# Altium PCB PCB1.PcbDoc
Units mm, origin at the board's own origin, x right, y up, seen from the top; angles counter-clockwise.
Board outline 28.5 x 23.5 mm, 2 copper layers (Top Layer, Bottom Layer); 34 components, 51 nets, 216 pads, 113 vias.
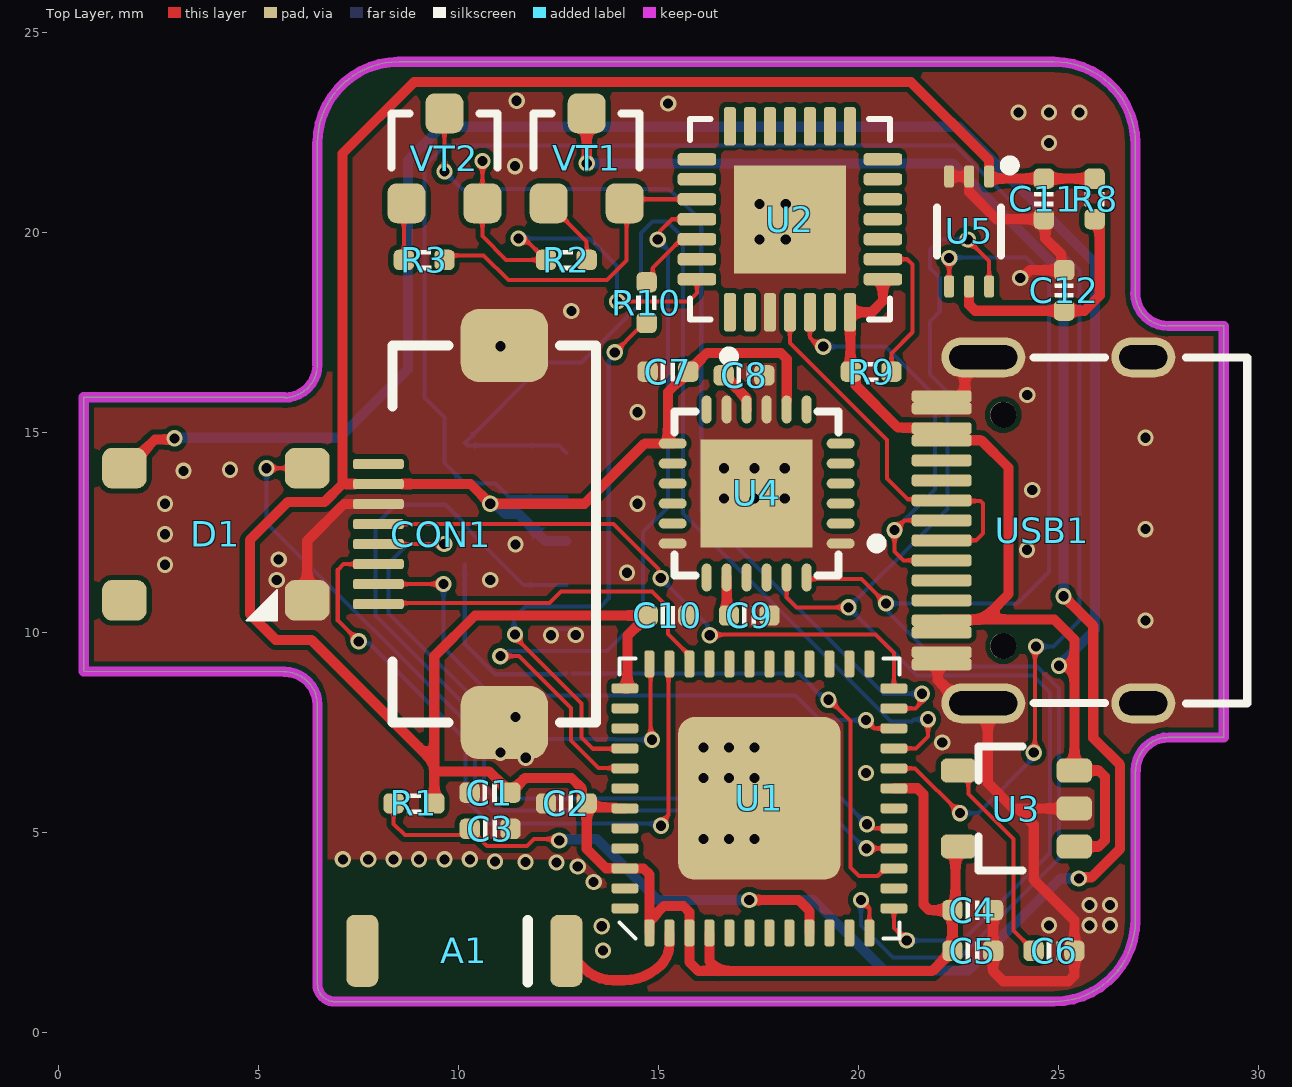
[diagram p0: Top Layer view]
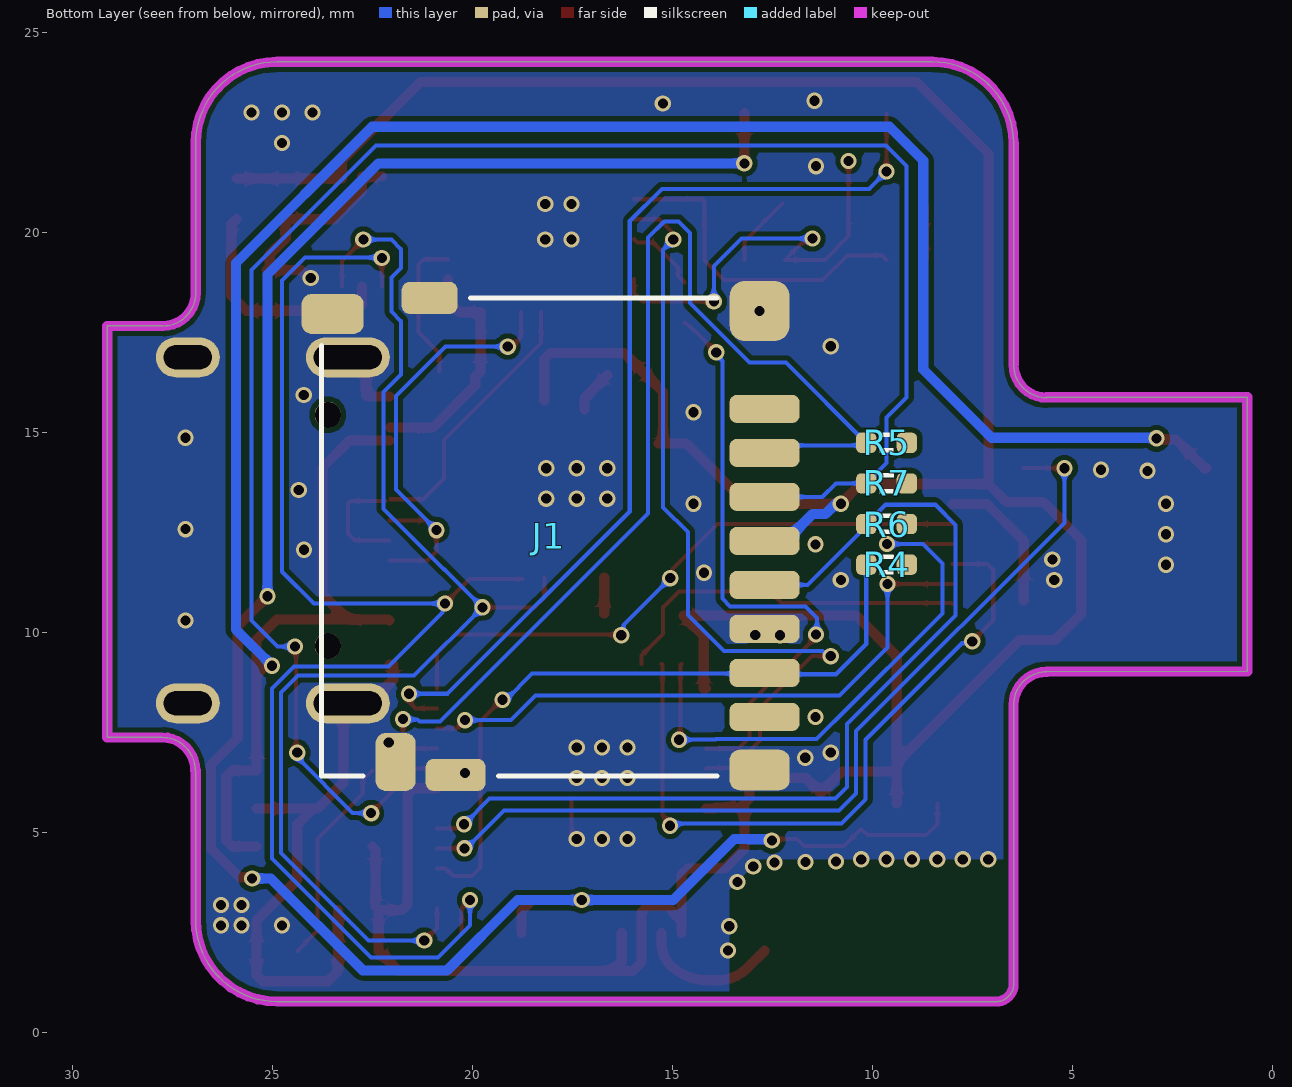
[diagram p1: Bottom Layer view, seen from below]
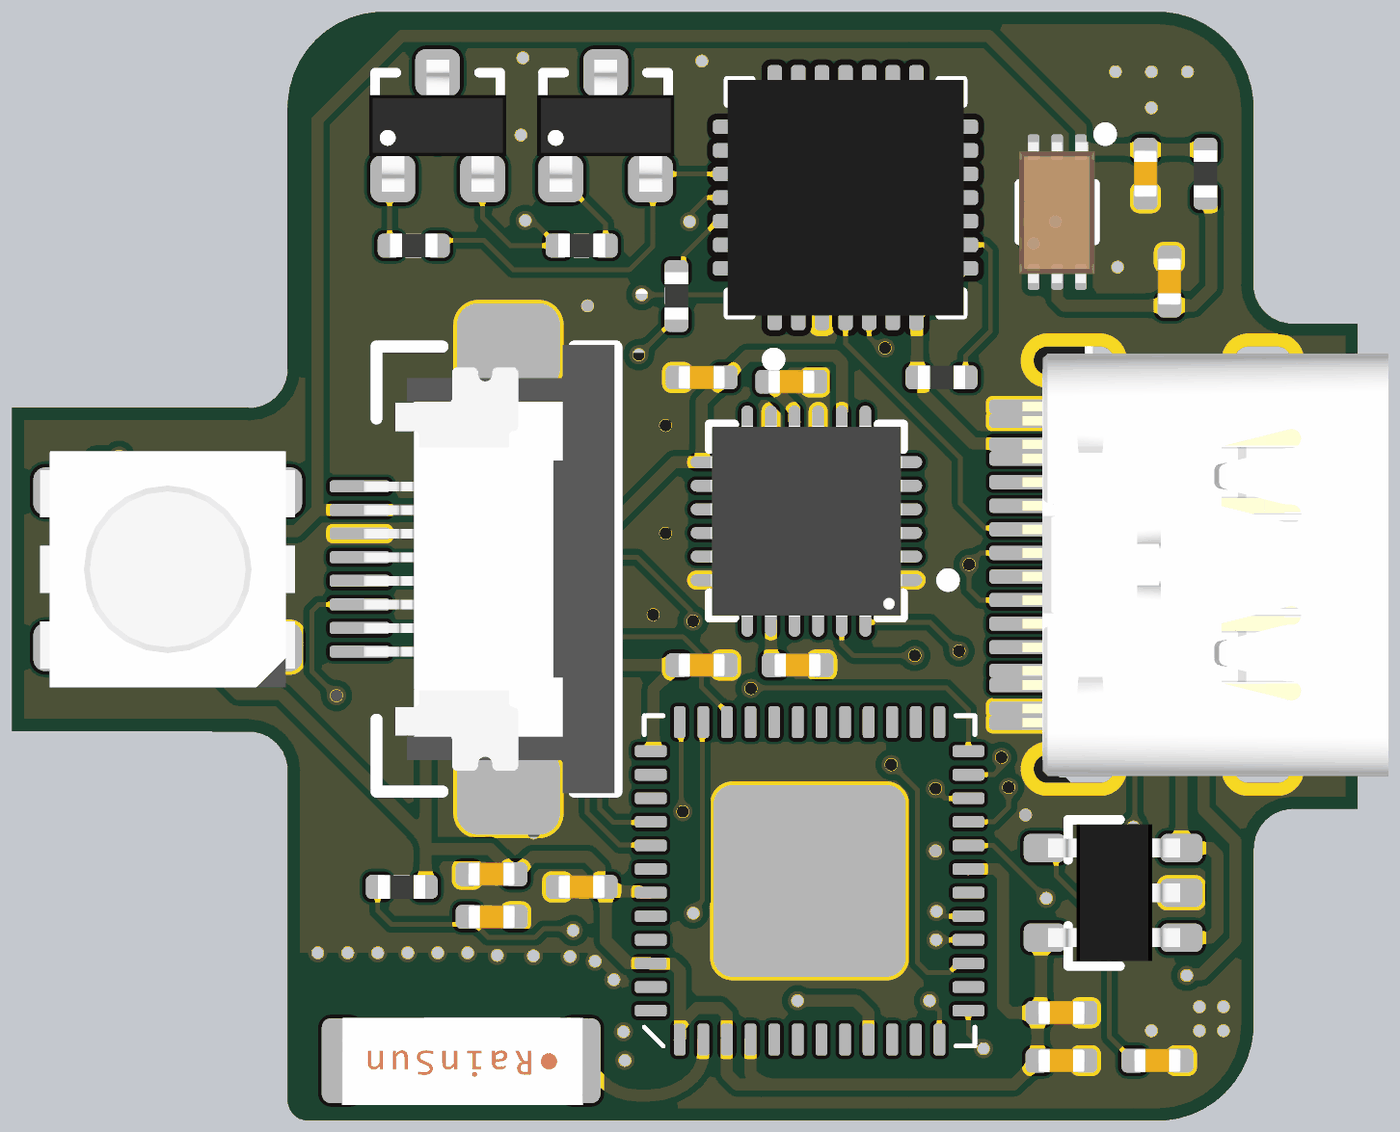
[diagram p2: 3D render of the assembled board from above, using the file's embedded part models]
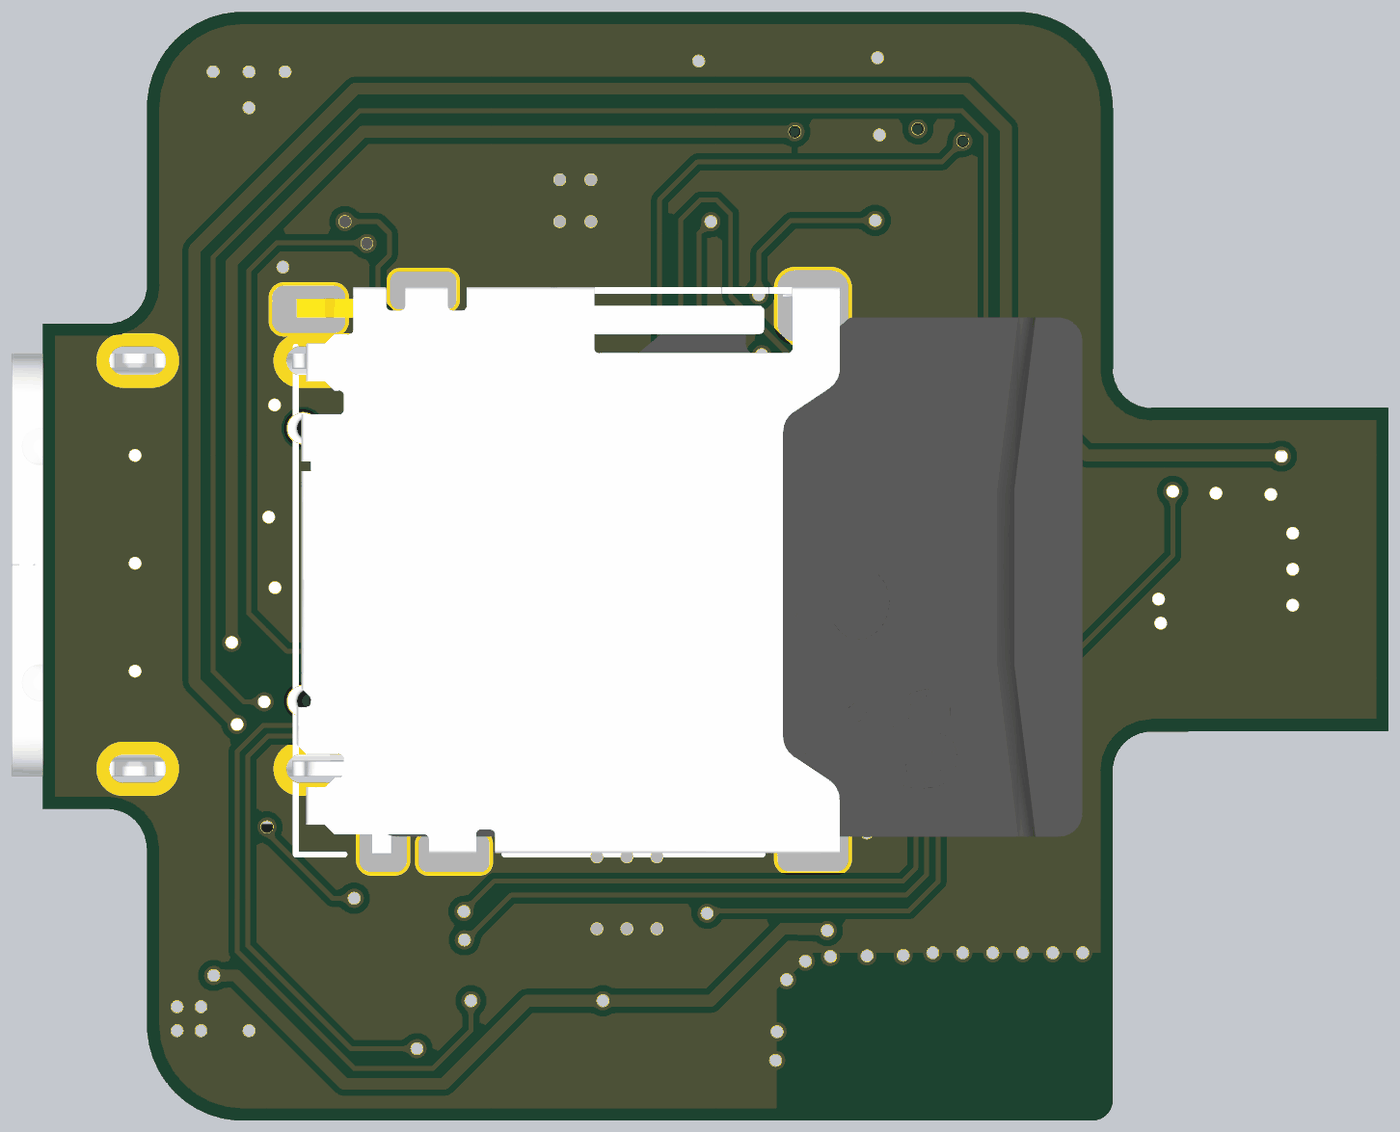
[diagram p3: 3D render of the assembled board from below, using the file's embedded part models]

## Layer stack, top to bottom
Top Solder: solder mask 0.0102, Solder Resist, Dk 3.5
Top Layer: signal copper 0.0356
Dielectric 1: dielectric 0.32, FR-4, Dk 4.8
Bottom Layer: signal copper 0.0356
Bottom Solder: solder mask 0.0102, Solder Resist, Dk 3.5

## Board outline
5.649,9.007 cw(c5.649,8.179) 6.477,8.179 6.477,1.196 ccw(c6.911,1.196) 6.911,0.762 24.892,0.762 ccw(c24.892,2.794) 26.924,2.794 26.924,6.538 26.934,6.538 cw(c27.762,6.538) 27.762,7.366 29.134,7.366 29.134,17.653 27.749,17.653 27.749,17.651 cw(c27.749,18.479) 26.922,18.479 26.924,18.479 26.924,22.225 ccw(c24.892,22.225) 24.892,24.257 8.509,24.257 ccw(c8.509,22.225) 6.477,22.225 6.472,22.225 6.472,16.688 6.477,16.688 cw(c5.649,16.688) 5.649,15.86 5.649,15.87 0.635,15.87 0.635,9.017

## Design rules (kind name [scope] priority, off if disabled: settings)
AssemblyTestPointUsage [All] p1 off:
AssemblyTestpoint [All] p1 off: testpointundercomponent=TRUE minsize=1.016 maxsize=2.54 preferedsize=1.524 minholesize=0 maxholesize=1.016 preferedholesize=0.813 testpointgrid=0.025 usegrid=TRUE gridtolerance=0 allowsidetop=TRUE allowsidebottom=TRUE
Clearance [All] p1: gap=0.127 ignorepadtopadclearanceinfootprint=FALSE
ComponentClearance [All] p1 off: gap=0.254 collisioncheckmode=3 verticalgap=0.254 showdistances=FALSE
DiffPairsRouting [All] p1 off: maxlimit=0.254 minlimit=0.229 mostfreqgap=0.229 toplayer_minwidth=0.102 toplayer_maxwidth=0.102 toplayer_prefwidth=0.102 bottomlayer_minwidth=0.102 bottomlayer_maxwidth=0.102 bottomlayer_prefwidth=0.102 maxuncoupledlength=12.7
FabricationTestPointUsage [All] p1 off: valid=0 allowmultiple=FALSE
FabricationTestpoint [All] p1 off: side=3 testpointundercomponent=TRUE minsize=1.016 maxsize=2.54 preferedsize=1.524 minholesize=0 maxholesize=1.016 preferedholesize=0.813 testpointgrid=0.025 allowsidetop=TRUE allowsidebottom=TRUE usegrid=TRUE gridtolerance=0
FanoutControl Fanout_BGA [IsBGA] p1 off: bgadir=Out bgaviamode=Centered fanoutstyle=Auto fanoutdirection=Alternating viagrid=0.025 // Fanout_BGA (Default Rule)
FanoutControl Fanout_LCC [IsLCC] p2 off: bgadir=Out bgaviamode=Centered fanoutstyle=Auto fanoutdirection=Alternating viagrid=0.025 // Fanout_LCC (Default Rule)
FanoutControl Fanout_SOIC [IsSOIC] p3 off: bgadir=Out bgaviamode=Centered fanoutstyle=Auto fanoutdirection=Alternating viagrid=0.025 // Fanout_SOIC (Default Rule)
FanoutControl Fanout_Small [(CompPinCount < 5)] p4 off: bgadir=Out bgaviamode=Centered fanoutstyle=Auto fanoutdirection=OutThenIn viagrid=0.025 // Fanout_Small (Default Rule)
FanoutControl Fanout_Default [All] p5 off: bgadir=Out bgaviamode=Centered fanoutstyle=Auto fanoutdirection=Alternating viagrid=0.025 // Fanout_Default (Default Rule)
Height [All] p1 off: minheight=0 maxheight=25.4 prefheight=12.7
HoleSize [All] p1 off: absolutevalues=TRUE maxlimit=2.54 minlimit=0.203 maxpercent=80.000 minpercent=20.000
HoleToHoleClearance [All] p1 off: gap=0.254 allowstackedmicrovias=TRUE
LayerPairs [All] p1 off: enforce=TRUE
MinimumSolderMaskSliver [All] p1 off: minsoldermaskwidth=0.051
NetAntennae [All] p1 off: netantennaetolerance=0
PasteMaskExpansion [All] p1 off: expansion=0
PlaneClearance [All] p1: clearance=0.203
PlaneConnect [All] p1: planeconnectstyle=Direct reliefexpansion=0.508 reliefentries=4 reliefconductorwidth=0.254 reliefairgap=0.254
PolygonConnect [All] p1: connectstyle=Direct reliefconductorwidth=0.254 reliefentries=4 polygonreliefangle="90 Angle" airgapwidth=0.254
RoutingCorners [All] p1 off: cornerstyle=45-Degree minsetback=2.54 maxsetback=2.54
RoutingLayers [All] p1 off: top layer_v5=TRUE bottom layer_v5=TRUE
RoutingPriority [All] p1 off: routingpriority=0
RoutingTopology [All] p1 off: topology=Shortest
RoutingVias [All] p1 off: holewidth=0.203 width=0.406 viastyle="Through Hole" minholewidth=0.152 minwidth=0.305 maxholewidth=0.711 maxwidth=1.27
SilkToSilkClearance [All] p1 off: silktosilkclearance=0.254
SilkToSolderMaskClearance [IsPad] p1 off: minsilkscreentomaskgap=0 clearancetoexposedcopper=TRUE
SolderMaskExpansion [All] p1 off: expansion=0.076 istentingtop=FALSE
Width PWR [InNetClass('PWR')] p1 off: maxlimit=50.8 minlimit=0.254 preferedwidth=0.254 minimp=50.000000 maximp=50.000000 favimp=50.000000
Width Width_1 [All] p2: maxlimit=254 minlimit=0.102 preferedwidth=0.102 minimp=50.000000 maximp=50.000000 favimp=50.000000
4 further rules are at their usual default settings.

## Components (designator, comment, footprint, x,y, rotation, side; value= is the part's Value field where it differs from the comment)
A1 "RAINSUN" ANT-Rainsun-AN5120 10.16,2.032 r180 top
C1 "10uF" CAP_0402 10.789,5.985 r0 top value=10u
C2 "0.1uF" CAP_0402 12.7,5.715 r0 top value=0.1u
C3 "1uF" CAP_0402 10.795,5.08 r180 top value=10u
C4 "10uF" CAP_0402 22.86,3.048 r180 top value=10u
C5 "0.1uF" CAP_0402 22.86,2.032 r180 top value=0.1u
C6 "10nF" CAP_0402 24.892,2.032 r180 top value=0.1u
C7 "10nF" CAP_0402 15.24,16.51 r0 top value=0.1u
C8 "0.1uF" CAP_0402 17.141,16.419 r0 top value=0.1u
C9 "2.2nF" CAP_0402 17.272,10.414 r180 top value=0.1u
C10 "0.1uF" CAP_0402 15.24,10.414 r180 top value=0.1u
C11 "0.1uF" CAP_0402 24.638,20.828 r270 top value=0.1u
C12 "1uF" CAP_0402 25.146,18.542 r90 top value=0.1u
CON1 "FFC_0.5_8" FFC_0.5_8 10.262,12.45 r90 top
D1 "RGB" LED_5050_WS2812B 3.936,12.445 r0 top
J1 "TF-Socket" "TF-Card-Amphenol with TF" 12.7,12.278 r90 bottom locked
R1 "10K" RES_0402 8.89,5.715 r0 top value=22R
R2 "10K" RES_0402 12.7,19.304 r180 top value=22R
R3 "10K" RES_0402 9.144,19.304 r0 top value=22R
R4 "10K" RES_0402 9.652,11.684 r0 bottom value=22R
R5 "10K" RES_0402 9.652,14.732 r0 bottom value=22R
R6 "10K" RES_0402 9.652,12.7 r0 bottom value=22R
R7 "10K" RES_0402 9.652,13.716 r0 bottom value=22R
R8 "1K" RES_0402 25.908,20.828 r90 top value=22R
R9 "10K" RES_0402 20.32,16.51 r0 top value=22R
R10 "200R" RES_0402 14.707,18.237 r90 top value=22R
U1 "ESP32_SIP" QFN-48_7X7 17.526,5.842 r90 top
U2 "CP2102" QFN-28 18.288,20.32 r90 top value=Value
U3 "LP2992 3V3" SOT23-5 23.9,5.588 r180 top
U4 "MPU6050" QFN-24 17.458,13.466 r180 top
U5 "BH1750FVI-TR" BH1750FVI 22.769,20.015 r270 top
USB1 "Type-C" Type-C-TOP 24.602,12.542 r0 top
VT1 "S8050" SMT_TRIODE_NPN 13.208,21.844 r0 top
VT2 "S8050" SMT_TRIODE_NPN 9.652,21.844 r0 top

## Footprints (in the part's own frame and the unit in brackets; to place one, negate y for a bottom-side part, rotate by r counter-clockwise, add the part's x,y. Pads: shape width x height; smd on the part's side, far side on the other; paste and mask are expansions set on the pad)
ANT-Rainsun-AN5120 [mm]
  rrect50% 0.8x1.8 smd: 1(-2.54,0) ""(2.563,0)
  silkscreen extent -1.57,-0.76 -1.57,0.79, body extent -2.57,-0.91 2.54,0.94, height 1.32
BH1750FVI [mm]
  rrect50% 0.55x0.25 smd paste+0 mask+0: 1(-1.375,0.5) 2(-1.375,0) 3(-1.375,-0.5) 4(1.375,-0.5) 5(1.375,0) 6(1.375,0.5)
  silkscreen extent -1.78,-0.8 0.6,1.14, body extent -1.49,-0.81 1.51,0.79, height 0.77
CAP_0402 [mil]
  rrect50% 20x20 smd: 1(-20,0) 2(20,0)
  silkscreen extent -6,-9 6,9, body extent -20,-10 20,10, height 20
FFC_0.5_8 [mil]
  rrect50% 72x86 smd: 0(-185.63,-35) 0(185.63,-35)
  rrect50% 10x50 smd: 1(-68.9,89) 2(-49.21,89) 3(-29.53,89) 4(-9.84,89) 5(9.84,89) 6(29.53,89) 7(49.21,89) 8(68.9,89)
  silkscreen extent -186,-125 186,75, body extent -187,-124 187,87, height 82
LED_5050_WS2812B [mil]
  rrect50% 44x40 smd: 1(-90,65) 2(-90,-65) 3(90,-65) 4(90,65)
  silkscreen extent 30,-85 60,-55, body extent -106,-98 106,98, height 69
QFN-24 [mm]
  oval 0.7x0.25 smd: 1(-2.1,1.25) 2(-2.1,0.75) 3(-2.1,0.25) 4(-2.1,-0.25) 5(-2.1,-0.75) 6(-2.1,-1.25) 13(2.1,-1.25) 14(2.1,-0.75) 15(2.1,-0.25) 16(2.1,0.25) 17(2.1,0.75) 18(2.1,1.25)
  oval 0.25x0.7 smd: 7(-1.25,-2.1) 8(-0.75,-2.1) 9(-0.25,-2.1) 10(0.25,-2.1) 11(0.75,-2.1) 12(1.25,-2.1) 19(1.25,2.1) 20(0.75,2.1) 21(0.25,2.1) 22(-0.25,2.1) 23(-0.75,2.1) 24(-1.25,2.1)
  rect 2.8x2.7 smd: ""(0,0)
  silkscreen extent -3.13,-2.05 2.05,2.05, body extent -2.02,-2.02 2.02,2.02, height 0.95
QFN-28 [mil]
  rrect50% 38x12 smd mask+5: 1(-91.5,59.06) 2(-91.5,39.37) 3(-91.5,19.68) 4(-91.5,0) 5(-91.5,-19.68) 6(-91.5,-39.37) 7(-91.5,-59.06) 15(91.5,-59.06) 16(91.5,-39.37) 17(91.5,-19.68) 18(91.5,0) 19(91.5,19.68) 20(91.5,39.37) 21(91.5,59.06)
  rrect50% 12x38 smd mask+5: 8(-59.06,-91.5) 9(-39.37,-91.5) 10(-19.68,-91.5) 11(0,-91.5) 12(19.68,-91.5) 13(39.37,-91.5) 14(59.06,-91.5) 22(59.06,91.5) 23(39.37,91.5) 24(19.68,91.5) 25(0,91.5) 26(-19.68,91.5) 27(-39.37,91.5) 28(-59.06,91.5)
  rect 106.3x110.24 smd: 29(0,0)
  silkscreen extent -140,-98 98,98, body extent -98,-98 98,98, height 35
QFN-48_7X7 [mm]
  rrect20% 4.064x4.064 smd: 0(0,0)
  rrect50% 0.675x0.25 smd: 1(-3.363,2.75) 2(-3.363,2.25) 3(-3.363,1.75) 4(-3.363,1.25) 5(-3.363,0.75) 6(-3.363,0.25) 7(-3.363,-0.25) 8(-3.363,-0.75) 9(-3.363,-1.25) 10(-3.363,-1.75) 11(-3.363,-2.25) 12(-3.363,-2.75) 25(3.363,-2.75) 26(3.363,-2.25) 27(3.363,-1.75) 28(3.363,-1.25) 29(3.363,-0.75) 30(3.363,-0.25) 31(3.363,0.25) 32(3.363,0.75) 33(3.363,1.25) 34(3.363,1.75) 35(3.363,2.25) 36(3.363,2.75)
  rrect50% 0.25x0.675 smd: 13(-2.75,-3.363) 14(-2.25,-3.363) 15(-1.75,-3.363) 16(-1.25,-3.363) 17(-0.75,-3.363) 18(-0.25,-3.363) 19(0.25,-3.363) 20(0.75,-3.363) 21(1.25,-3.363) 22(1.75,-3.363) 23(2.25,-3.363) 24(2.75,-3.363) 37(2.75,3.363) 38(2.25,3.363) 39(1.75,3.363) 40(1.25,3.363) 41(0.75,3.363) 42(0.25,3.363) 43(-0.25,3.363) 44(-0.75,3.363) 45(-1.25,3.363) 46(-1.75,3.363) 47(-2.25,3.363) 48(-2.75,3.363)
  silkscreen extent -3.5,-3.5 3.5,3.5, body extent -3.5,-3.5 3.5,3.5, height 1
RES_0402 [mil]
  rrect50% 20x20 smd: 1(-20,0) 2(20,0)
  silkscreen extent -6,-10 6,10, body extent -20,-10 20,10, height 14
SMT_TRIODE_NPN [mm]
  rrect50% 0.95x1 smd: 1(-0.95,-1.125) 2(0.95,-1.125) 3(0,1.125)
  silkscreen extent -1.33,-0.22 1.32,1.13, body extent -1.45,-1.4 1.45,1.4, height 1.3
SOT23-5 [mm]
  rrect50% 0.889x0.6 smd: 1(-1.5,0.95) 2(-1.5,0) 3(-1.5,-0.95) 4(1.396,-0.95) 5(1.396,0.95)
  silkscreen extent -0.2,-1.55 0.9,1.55, body extent -1.48,-1.45 1.32,1.45, height 1.2
"TF-Card-Amphenol with TF" [mm]
  rrect50% 0.7x1.75 smd: 1(3.3,0) 2(2.2,0) 3(1.1,0) 4(0,0) 5(-1.1,0) 6(-2.2,0) 7(-3.3,0) 8(-4.4,0)
  rrect50% 1x1.55 smd: 9(5.675,10.8)
  rrect50% 1.45x1 smd: 10(-5.525,9.225)
  rrect50% 1.5x1.5 smd: S1(5.75,0.125)
  rrect50% 1.016x1.5 smd: S2(-5.727,0.125)
  rrect50% 0.8x1.4 smd: S3(6.075,8.375)
  rrect50% 0.8x1.5 smd: S4(-5.85,7.725)
  silkscreen extent -5.87,1.19 6.07,11.07, body extent -5.85,-5.58 6.15,11.06, height 1.69
Type-C-TOP [mm]
  round 0.65 hole 0.65: 0(-0.98,-2.89) 0(-0.98,2.89)
  oval 1.6x1 hole 0.6 slot 1.2 at 0 deg: 1(2.52,4.325) 2(2.52,-4.325)
  oval 2.1x1 hole 0.6 slot 1.7 at 0 deg: 3(-1.48,-4.325) 4(-1.48,4.325)
  rrect50% 1.5x0.3 smd: A1(-2.52,-3.35) A4(-2.52,-2.55) A5(-2.52,-1.25) A6(-2.52,-0.25) A7(-2.52,0.25) A8(-2.52,1.25) A9(-2.52,2.55) A12(-2.52,3.35) B1(-2.52,3.05) B4(-2.52,2.25) B5(-2.52,1.75) B6(-2.52,0.75) B7(-2.52,-0.75) B8(-2.52,-1.75) B9(-2.52,-2.25) B12(-2.52,-3.05)
  silkscreen extent -0.22,-4.33 5.12,4.33, body extent -2.57,-4.48 5.18,4.48, height 3.26

## Part data
A1: library part ANT-Rainsun-AP5120
C1 C3 C4: library part 电容-0402_3, "Capacitor"
C2 C5 C6 C7 C8 C9 C10 C11 C12: library part 电容-0402, "Capacitor"
CON1: "FFC", System=Connector
D1: library part LED_5050_WS2812B, "LED", Type=5050
J1: "10 _8 + 2_ Position Card Connector Secure Digital - microSDâ„¢ Surface Mount, Right Angle Gold", Package=None, Availability=Unavailable, MF="Amphenol Commercial Products", MP=1140084168, Price=None, SnapEDA_Link=https://www.snapeda.com/parts/1140084168/Amphenol/view-part/4544529/?ref=snap
R1 R2 R3 R4 R5 R6 R7 R8 R9 R10: library part 电阻-0402_1, "Resistor"
U1: library part ESP32-PICO
U2: "USB转TTL", MFG #1="SILICON LABS", PART DESC="SINGLE-CHIP USB TO UART BRIDGE, QFN28, RoHS.", PART NUMBER=CP2102, RefDes=RefDes, Type=DEV
U3: library part LP2992, "LDO"
U4: "六轴传感器"
USB1: library part USB-Type-C-TOP
VT1 VT2: library part SMT_TRIODE_NPN, "Surface mount NPN transistor, package SOT-23"

## Via types
v1: diameter 0.406, hole 0.254, Top Layer to Bottom Layer, tented both sides, 113 vias

## Nets (pads, with @x,y where several pads share a name; then routed paths per layer and width w, separated by ;. In a path a pad name is that pad's centre, name@x,y a point inside that pad or via, vN(x,y) a via of type N, cw(c..) or ccw(c..) an arc to the next point about the centre after c; other vN are vias at no path point)
BH_SCL: U1.13 U4.23 U5.6 | length 30.3
  Top Layer w0.102: U4.23 18.208,10.864 18.454,10.618 v1(19.753,10.618) ; U1.13 20.889,2.606 v1(21.209,2.286) ; v1(22.733,19.812) 23.269,19.276 U5.6
  Bottom Layer w0.102: v1(21.209,2.286) 22.602,2.286 24.79,4.475 24.79,8.484 24.364,8.91 21.462,8.91 v1(19.753,10.618) 20.692,11.557 20.701,11.557 22.225,13.081 22.225,16.002 21.791,16.436 21.791,17.77 22.034,18.012 22.034,18.86 21.791,19.103 21.791,19.569 22.034,19.812 v1(22.733,19.812)
BH_SDA: U1.12 U4.24 U5.4 | length 34.7
  Top Layer w0.102: U4.24@18.75,11.324 20.079,11.324 v1(20.69,10.713) ; v1(20.066,3.302) 20.276,3.092 U1.12 ; U5.4 v1(22.269,19.348) v1@22.276,19.355
  Bottom Layer w0.102: v1(20.066,3.302) 20.066,2.67 20.868,1.868 22.544,1.868 25.019,4.343 25.019,8.588 24.469,9.138 22.104,9.138 20.748,10.494 20.748,10.654 v1(20.69,10.713) 23.972,10.713 24.767,11.507 24.767,18.784 24.187,19.364 22.285,19.364 v1(22.269,19.348)
BL: CON1.1 U1.34 | length 9.2
  Top Layer w0.102: CON1.1 8.026,10.725 12.274,10.725 12.561,11.012 14.846,11.012 15.238,10.62 15.238,9.955 15.776,9.417 U1.34
CP_RX: U1.41 U2.25 | length 19.8
  Top Layer w0.102: v1(11.049,9.398) 11.52,9.398 12.816,8.102 12.816,7.284 13.5,6.6 14.156,6.6 U1.41 ; v1(14.986,19.812) 15.044,19.87 15.044,20.024 15.341,20.32 U2.25
  Bottom Layer w0.102: v1(11.049,9.398) 11.131,9.398 11.258,9.525 13.716,9.525 14.621,10.43 14.621,12.5 15.24,13.119 15.24,19.558 v1(14.986,19.812)
CP_TX: R10.1 U1.40 | length 14.8
  Top Layer w0.102: v1(11.418,9.941) 11.418,9.872 13.081,8.21 13.081,7.366 13.365,7.082 14.154,7.082 U1.40 ; v1(13.91,16.992) 14.454,17.536 14.472,17.536 14.665,17.729 R10.1
  Bottom Layer w0.102: v1(11.418,9.941) 11.389,9.971 11.389,10.348 11.684,10.643 13.568,10.643 13.759,10.833 13.759,16.78 13.91,16.931 v1(13.91,16.992)
DC: CON1.2 U1.22 | length 15.3
  Top Layer w0.102: CON1.2 v1(9.628,11.2) ; v1(20.193,7.798) 20.401,7.59 20.886,7.59 U1.22
  Bottom Layer w0.102: v1@9.628,11.194 9.628,9.618 10.831,8.415 18.426,8.415 19.043,7.798 v1(20.193,7.798)
DTR: R2.2 U2.28 VT2.2 | length 10.7
  Top Layer w0.102: v1(10.602,21.778) 10.602,19.897 11.195,19.304 R2.2 11.659,19.837 v1(11.506,19.837) ; v1(13.97,18.263) 15.748,18.263 15.964,18.479 U2.28
  Bottom Layer w0.102: v1(11.506,19.837) 13.284,19.837 13.97,19.152 v1(13.97,18.263)
EN: C3.2 R1.1 U1.9 VT1.3 | length 53.2
  Top Layer w0.102: R1.1 8.382,5.204 8.662,4.924 10.024,4.924 10.131,4.924 C3.2 10.72,4.647 11.715,4.647 11.894,4.826 12.485,4.826 v1(12.52,4.79)
  Top Layer w0.254: v1(13.208,21.717) VT1.3 ; v1(17.272,3.302) 18.506,3.302 18.778,3.03 U1.9@18.778,2.481 ; v1(25.131,10.895) 25.872,10.154 25.872,7.351 26.543,6.68 26.543,4.58 25.83,3.867 25.542,3.867 v1(25.513,3.838)
  Bottom Layer w0.254: v1(12.52,4.79) 12.549,4.819 13.099,4.819 13.107,4.828 13.46,4.828 14.986,3.302 v1(17.272,3.302) 18.878,3.302 20.638,1.542 22.748,1.542 25.043,3.838 v1(25.513,3.838) ; v1(13.208,21.717) 22.353,21.717 25.131,18.939 v1(25.131,10.895)
FLASH_CLK: U1.31
FLASH_CS: U1.25
FLASH_SD: U1.27
FLASH_SD1: U1.33
FLASH_SD2: U1.30
FLASH_SD3: U1.32
GND: C1.1 C2.1 C3.1 C4.1 C5.1 C6.1 C7.1 C8.2 C9.1 C10.1 C11.2 C12.2 CON1.0 CON1.6 D1.3 J1.6 J1.9 J1.10 J1.S1 J1.S2 J1.S3 J1.S4 U1.0 U2.3 U2.29 U3.2 U4. U4.1 U4.9 U4.11 U4.18 U5.2 U5.3 USB1.1 USB1.2 USB1.3 USB1.4 USB1.A1 USB1.A12 USB1.B1 USB1.B12 | length 27.8
  Top Layer w0.102: CON1.0@11.29,7.874 v1(11.43,7.874) ; v1(17.399,4.826) 17.526,4.953 U1.0
  Top Layer w0.254: D1.3 6.222,12.28 7.142,13.2 CON1.6 ; USB1.A1 22.009,9.192 21.986,9.169 21.986,8.805 22.573,8.217 USB1.3 ; USB1.A12 22.642,15.892 22.665,15.915 22.665,16.522 23.009,16.867 USB1.4 ; U5.3 U5.2 22.769,21.004 23.454,20.32 C11.2 24.674,20.284 24.674,19.84 25.073,19.441 25.073,19.123 C12.2 24.29,19.05 24.089,18.849 v1(24.048,18.849) ; USB1.3@23.234,8.197 23.234,6.23 23.876,5.588 23.981,5.588 ; C4.1 C5.1 23.368,1.524 23.622,1.27 25.251,1.27 25.4,1.419 C6.1 25.4,2.794 24.384,3.81 24.384,5.185 23.981,5.588 ; U3.2 23.981,5.588
  Bottom Layer w0.102: v1(12.314,9.92) 12.472,10.078 12.784,10.078 v1(12.936,9.926)
  other v1: 13.615,2.039 13.585,2.645 24.765,2.667 25.781,2.667 26.289,2.667 25.781,3.175 26.289,3.175 13.382,3.749 12.984,4.14 11.68,4.253 12.454,4.24 10.913,4.265 7.112,4.318 7.747,4.318 8.382,4.318 9.017,4.318 9.652,4.318 10.287,4.318 16.129,4.826 16.764,4.826 16.129,6.35 16.764,6.35 17.399,6.35 20.193,6.477 11.684,6.858 11.049,6.985 16.129,7.112 16.764,7.112 17.399,7.112 22.098,7.239 27.178,10.287 5.461,11.303 10.795,11.303 14.215,11.483 2.667,11.684 5.507,11.814 24.215,12.056 11.43,12.192 2.667,12.446 27.178,12.573 2.667,13.208 14.478,13.208 16.637,13.335 17.399,13.335 18.161,13.335 24.348,13.551 3.129,14.03 4.291,14.057 16.637,14.097 17.399,14.097 18.161,14.097 27.178,14.859 14.478,15.494 24.223,15.927 11.049,17.145 12.825,18.028 17.526,19.812 18.186,19.812 17.526,20.701 18.186,20.701 11.415,21.648 24.765,22.225 24.003,22.987 24.765,22.987 25.527,22.987 15.244,23.214 11.457,23.282
GPIO0: U1.23 VT2.3 | length 24
  Top Layer w0.102: v1(9.652,21.514) VT2.3 ; U1.23 21.427,8.092 21.59,8.255 v1(21.59,8.458)
  Bottom Layer w0.102: v1(9.652,21.514) 10.086,21.08 15.268,21.08 16.072,20.276 16.072,13.01 20.624,8.458 v1(21.59,8.458)
GPIO4: CON1.5 U1.24 | length 15.3
  Top Layer w0.102: CON1.5 13.88,12.7 14.905,11.675 15.001,11.58 15.001,11.406 v1(15.059,11.348) ; v1(16.285,9.919) 16.301,9.935 20.427,9.935 20.889,9.474 U1.24
  Bottom Layer w0.102: v1(15.059,11.348) 16.227,10.18 16.227,9.978 v1(16.285,9.919)
GPIO9: U1.28
GPIO10: U1.29
GPIO12: U1.18
GPIO13: J1.3 R7.2 U1.20 | length 46.4
  Top Layer w0.102: U1.20 21.419,6.592 v1(22.538,5.473) ; v1(24.384,6.985) 24.414,7.015 24.414,9.607 v1(24.443,9.636)
  Bottom Layer w0.102: J1.3 11.26,13.378 10.922,13.716 R7.2 9.652,14.224 9.652,15.367 9.159,15.86 9.159,21.655 9.669,22.165 22.416,22.165 25.527,19.054 25.527,10.287 24.876,9.636 v1(24.443,9.636) ; v1(22.538,5.473) 22.999,5.473 24.384,6.858 v1(24.384,6.985)
GPIO14: J1.5 R6.2 U1.17 | length 24.2
  Top Layer w0.102: v1(20.214,5.195) 20.297,5.195 20.4,5.092 U1.17
  Bottom Layer w0.102: J1.5 11.624,11.178 10.354,12.448 10.354,12.465 10.16,12.659 R6.2 9.677,13.183 8.433,13.183 7.925,12.675 7.925,10.419 10.643,7.701 10.643,6.123 10.93,5.835 19.574,5.835 v1(20.214,5.195)
GPIO15: J1.2 R5.2 U1.21 | length 28.2
  Top Layer w0.102: U1.21 21.439,7.092 21.74,7.394 v1(21.74,7.822)
  Bottom Layer w0.102: J1.2 12.511,14.667 10.225,14.667 R5.2 12.167,16.739 13.081,16.739 14.568,18.226 14.568,19.978 14.859,20.269 15.21,20.269 15.621,19.858 15.621,12.961 20.82,7.762 21.334,7.762 21.385,7.813 21.731,7.813 v1(21.74,7.822)
GPIO18: CON1.3 U1.35 | length 17.6
  Top Layer w0.102: v1(7.51,9.767) 6.985,10.292 6.985,11.557 7.128,11.7 CON1.3 ; v1(15.065,5.156) 15.065,5.239 15.253,5.427 15.253,9.182 U1.35
  Bottom Layer w0.102: v1(7.51,9.767) 7.557,9.72 7.762,9.72 10.175,7.308 10.175,5.82 10.784,5.21 15.011,5.21 v1(15.065,5.156)
GPIO19: U1.38
GPIO21: U1.42
GPIO22: U1.39
GPIO23: CON1.4 U1.36 | length 14.3
  Top Layer w0.102: CON1.4 v1(9.644,12.2) ; U1.36 14.809,9.172 14.809,7.341 v1(14.841,7.309)
  Bottom Layer w0.102: v1(9.644,12.2) 8.746,12.2 8.255,11.709 8.255,10.465 10.973,7.747 10.981,7.747 11.4,7.328 13.913,7.328 13.932,7.309 v1(14.841,7.309)
GPIO25: U1.14
GPIO26: J1.7 R4.2 U1.15 | length 17.2
  Top Layer w0.102: v1@19.329,8.306 19.329,8.255 19.807,7.777 19.807,4.11 20.017,3.9 20.484,3.9 20.676,4.092 U1.15
  Bottom Layer w0.102: R4.2 10.16,9.697 10.911,8.945 12.667,8.945 J1.7 ; J1.7@12.853,8.978 12.869,8.962 18.514,8.962 19.171,8.306 v1(19.253,8.306)
GPIO27: D1.4 U1.16 | length 22.3
  Top Layer w0.102: v1(5.206,14.096) D1.4 ; v1(20.205,4.592) U1.16
  Bottom Layer w0.102: v1(5.206,14.096) 5.207,12.731 10.414,7.524 10.414,5.969 10.844,5.539 19.214,5.539 20.161,4.592 v1(20.205,4.592)
GPIO34: U1.10
GPIO35: U1.11
NetA1_1: A1.1 U1.2 | length 3.6
  Top Layer w0.254: A1.1 13.131,1.601 ccw(c13.868,2.338) 13.868,1.295 14.142,1.295 ccw(c14.142,2.596) 15.062,1.676 ccw(c14.546,2.193) 15.276,2.193 U1.2
NetC6_2: C6.2 U3.4 | length 5.3
  Top Layer w0.102: U3.4 22.506,6.538 22.748,6.296 22.748,5.954 23.876,4.826 23.876,2.54 C6.2
NetC8_1: C8.1 U4.10 | length 1.1
  Top Layer w0.254: C8.1 17.206,15.846 17.206,15.568 U4.10
NetC9_2: C9.2 U4.20 | length 0.9
  Top Layer w0.254: U4.20 16.71,11.364 C9.2@16.71,10.468
NetC12_1: C12.1 R8.1 U5.5 | length 5.9
  Top Layer w0.254: U5.5 22.769,18.183 22.918,18.034 C12.1 25.654,18.034 26.033,18.413 26.033,20.195 R8.1
NetR2_1: R2.1 VT1.1 | length 1.8
  Top Layer w0.102: VT1.1 13.208,19.769 R2.1
NetR3_1: R3.1 VT2.1 | length 1.3
  Top Layer w0.102: R3.1 VT2.1@8.636,20.653
NetR9_2: R9.2 U2.9 | length 3.7
  Top Layer w0.102: U2.9 21.221,19.32 21.356,19.185 21.356,17.495 20.828,16.967 R9.2
NetR10_2: R10.2 U2.26 | length 1.8
  Top Layer w0.102: R10.2 14.861,18.9 14.861,19.109 15.487,19.734 15.878,19.734 U2.26
RTS: R3.2 U2.24 VT1.2 | length 8.3
  Top Layer w0.102: R3.2 9.764,19.416 10.629,19.416 11.249,18.796 13.716,18.796 14.209,19.289 14.209,20.77 14.259,20.82 U2.24
SENSOR_CAPN: U1.7
SENSOR_CAPP: U1.6
SENSOR_VN: U1.8
SENSOR_VP: U1.5
USB_DN: U2.5 USB1.A7 USB1.B7 | length 11.2
  Top Layer w0.102: U2.5 18.788,17.361 18.955,17.193 19.065,17.193 v1(19.123,17.135) ; USB1.B7 21.126,11.792 20.904,12.014 v1(20.904,12.548) 21.149,12.792 USB1.A7
  Bottom Layer w0.102: v1(19.123,17.135) 20.681,17.135 21.919,15.897 21.919,13.563 v1(20.904,12.548)
USB_DP: U2.4 USB1.A6 USB1.B6 | length 9.5
  Top Layer w0.102: U2.4 18.288,17.232 20.716,14.804 20.716,13.844 21.241,13.319 USB1.B6@22.055,13.319 ; USB1.A6 22.937,12.292 23.114,12.47 23.114,13.217 23.055,13.277 USB1.B6@22.179,13.277
VDD_5V: D1.1 R9.1 U2.7 U2.8 U3.1 U3.3 USB1.A4 USB1.A9 USB1.B4 USB1.B9 | length 65.1
  Top Layer w0.254: D1.1 1.701,14.096 2.418,14.813 2.876,14.813 v1(2.906,14.842) ; U2.8 20.612,18.275 20.333,17.996 U2.7 19.8,17.984 19.8,16.522 19.935,16.387 19.935,16.168 20.988,15.115 USB1.A9@22.059,15.115 ; USB1.B9 22.105,10.315 23.12,10.315 ; USB1.B4 23.074,14.792 23.754,14.112 23.754,10.949 23.12,10.315 ; v1(25.018,9.157) 25.031,9.144 25.4,9.144 ; U3.1 26.013,4.638 26.162,4.787 26.162,6.389 26.013,6.538 U3.3 25.4,9.144 ; 23.12,10.315 24.898,10.315 25.4,9.813 25.4,9.144
  Bottom Layer w0.254: v1@2.921,14.859 7.03,14.859 8.737,16.566 8.737,21.79 9.578,22.631 22.509,22.631 25.915,19.225 25.915,10.061 25.018,9.164 v1(25.018,9.157)
VDDA: C1.2 C2.2 C4.2 C5.2 C7.2 C10.2 C11.1 CON1.7 J1.4 R1.2 R8.2 U1.1 U1.3 U1.4 U1.19 U1.37 U1.43 U1.46 U3.5 U4.8 U4.13 U5.1 | length 96.1
  Top Layer w0.254: R1.2 9.398,6.518 ; C2.2@13.208,5.592 13.208,4.575 13.689,4.094 14.162,4.094 U1.46 14.165,4.09 14.629,4.09 14.778,3.941 U1.1@14.778,2.789 ; U1.43 13.955,5.592 13.929,5.618 13.305,5.618 C2.2 13.081,5.842 13.081,6.096 12.827,6.35 11.663,6.35 C1.2 10.764,6.518 9.398,6.518 ; U1.37 14.222,8.592 14.224,8.594 14.224,9.906 C10.2 10.414,10.414 9.398,9.398 9.398,6.731 ; U1.1 14.778,2.481 U1.1@14.778,2.789 ; U1.4 16.274,2.478 16.274,1.76 16.51,1.524 ; U4.8@18.21,15.789 18.21,16.825 18.061,16.974 16.212,16.974 C7.2 15.24,16.002 15.24,14.718 U4.13 U4.13 14.662,14.716 13.154,13.208 v1(10.795,13.208) 10.303,13.7 CON1.7 7.103,13.7 ; U1.19 20.89,6.094 21.476,6.094 21.625,5.945 21.625,3.197 21.774,3.048 C4.2 ; U3.5 22.428,4.562 22.428,3.124 C4.2 ; R8.2 C11.1 23.271,21.336 23.269,21.338 23.269,21.794 21.314,23.749 8.89,23.749 7.103,21.962 7.103,13.7 ; 7.103,13.7 6.657,13.253 5.739,13.253 4.787,12.301 4.787,10.453 5.436,9.804 6.325,9.804 9.398,6.731 ; 9.398,6.518 9.398,6.731 ; U1.1@14.778,2.789 15.138,3.15 15.627,3.15 15.776,3.001 U1.3 15.776,1.75 16.002,1.524 16.51,1.524 ; 16.51,1.524 21.844,1.524 C5.2 C4.2
  Bottom Layer w0.254: v1(10.795,13.208) 10.922,13.208 11.176,12.954 11.499,12.954 12.175,12.278 J1.4
pads on no net: A1. CON1.8 D1.2 J1.1 J1.8 R4.1 R5.1 R6.1 R7.1 U1.26 U1.44 U1.45 U1.47 U1.48 U2.1 U2.2 U2.6 U2.10 U2.11 U2.12 U2.13 U2.14 U2.15 U2.16 U2.17 U2.18 U2.19 U2.20 U2.21 U2.22 U2.23 U2.27 U4.2 U4.3 U4.4 U4.5 U4.6 U4.7 U4.12 U4.14 U4.15 U4.16 U4.17 U4.19 U4.21 U4.22 USB1.0 USB1.A5 USB1.A8 USB1.B5 USB1.B8

## Polygon pours and split planes (outlines as drawn)
GND on Top Layer "GND_L01_P001" (solid, remove dead copper, pour order 1): -1.778,26.162 34.29,26.162 35.433,25.019 35.433,-2.159 -0.508,-2.159 -0.635,-2.286 -1.778,-1.143
GND on Bottom Layer "GND_L02_P002" (solid, remove dead copper, pour order 2): 0.635,24.511 28.702,24.511 31.75,21.463 31.115,20.828 31.115,0 0.635,0 -0.254,0.889

## Keep-outs
Keep-Out Layer:
  lines w0.254: 5.649,9.007 cw(c5.649,8.179) 6.477,8.179 6.477,1.196 ccw(c6.911,1.196) 6.911,0.762 24.892,0.762 ccw(c24.892,2.794) 26.924,2.794 26.924,6.538 ; 5.649,9.017 0.635,9.017 0.635,15.87 5.649,15.87 ; 5.649,15.86 ccw(c5.649,16.688) 6.477,16.688 ; 6.472,16.688 6.472,22.225 ; 6.477,22.225 cw(c8.509,22.225) 8.509,24.257 24.892,24.257 cw(c24.892,22.225) 26.924,22.225 26.924,18.479 ; 26.922,18.479 ccw(c27.749,18.479) 27.749,17.651 ; 26.934,6.538 cw(c27.762,6.538) 27.762,7.366 29.134,7.366 29.134,17.653 27.749,17.653

## Other copper
Top Layer:
  pour cut-out: 6.096,4.318 12.827,4.318 13.589,3.556 13.589,0.127 6.096,0.127
Bottom Layer:
  pour cut-out: 6.096,4.318 12.827,4.318 13.589,3.556 13.589,0.127 6.096,0.127

## Silkscreen, mask and mechanical layers (free items; w line width, h text height)
Drill Drawing:
  circle w0.254: c-29.016,52.28 r0.847
  lines w0.254: -29.863,40.427 -29.439,40.427 -29.016,40.004 -28.593,40.427 -28.169,40.427 -28.593,40.85 -28.169,41.274 -28.593,41.274 -29.016,41.697 -29.439,41.274 -29.863,41.274 -29.439,40.85 -29.863,40.427 ; -29.863,45.507 -28.169,45.507 -29.016,43.814 -29.863,45.507 ; -29.863,47.624 -28.169,47.624 -28.169,49.317 -29.863,49.317 -29.863,47.624
  lines w0.381: -31.381,38.861 311.727,38.861 ; -31.381,54.101 311.727,54.101 ; -17.389,35.051 -17.389,57.911 ; -2.661,35.051 -2.661,57.911 ; 25.271,35.051 25.271,57.911 ; 38.12,35.051 38.12,57.911 ; 56.759,35.051 56.759,57.911 ; 94.847,35.051 94.847,57.911 ; 109.829,35.051 109.829,57.911 ; 128.773,35.051 128.773,57.911 ; 158.99,35.051 158.99,57.911 ; 180.675,35.051 180.675,57.911 ; 214.549,35.051 214.549,57.911 ; 248.423,35.051 248.423,57.911 ; 276.101,35.051 276.101,57.911 ; -31.381,35.051 311.727,35.051 311.727,57.911 -31.381,57.911 -31.381,35.051
  text "Symbol" at -29.095,55.244 h1.83
  text "Count" at -16.246,55.244 h1.83
  text "Hole Size" at -1.518,55.244 h1.83
  text "Plated" at 26.414,55.244 h1.83
  text "Hole Type" at 39.263,55.244 h1.83
  text "Drill Layer Pair" at 57.902,55.244 h1.83
  text "Via/Pad" at 95.99,55.244 h1.83
  text "Pad Shape" at 110.972,55.244 h1.83
  text "Template" at 129.916,55.244 h1.83
  text "Description" at 160.133,55.244 h1.83
  text "Hole Tolerance (+)" at 181.818,55.244 h1.83
  text "Hole Tolerance (-)" at 215.692,55.244 h1.83
  text "Hole Length" at 249.566,55.244 h1.83
  text "Routed Path Length" at 277.244,55.244 h1.83
  text "2" at -16.246,51.434 h1.52
  text "23.62mil (0.600mm)" at -1.518,51.434 h1.52
  text "PTH" at 26.414,51.434 h1.52
  text "Slot" at 39.263,51.434 h1.52
  text "Top Layer - Bottom Layer" at 57.902,51.434 h1.52
  text "Pad" at 95.99,51.434 h1.52
  text "Rounded" at 110.972,51.434 h1.52
  text "r160_100h60_120r100" at 129.916,51.434 h1.52
  text "47.24mil (1.200mm)" at 249.566,51.434 h1.52
  text "23.62mil (0.600mm)" at 277.244,51.434 h1.52
  text "2" at -16.246,47.624 h1.52
  text "23.62mil (0.600mm)" at -1.518,47.624 h1.52
  text "PTH" at 26.414,47.624 h1.52
  text "Slot" at 39.263,47.624 h1.52
  text "Top Layer - Bottom Layer" at 57.902,47.624 h1.52
  text "Pad" at 95.99,47.624 h1.52
  text "Rounded" at 110.972,47.624 h1.52
  text "r210_100h60_170r100" at 129.916,47.624 h1.52
  text "66.93mil (1.700mm)" at 249.566,47.624 h1.52
  text "43.31mil (1.100mm)" at 277.244,47.624 h1.52
  text "2" at -16.246,43.814 h1.52
  text "25.59mil (0.650mm)" at -1.518,43.814 h1.52
  text "PTH" at 26.414,43.814 h1.52
  text "Round" at 39.263,43.814 h1.52
  text "Top Layer - Bottom Layer" at 57.902,43.814 h1.52
  text "Pad" at 95.99,43.814 h1.52
  text "Rounded" at 110.972,43.814 h1.52
  text "c65h65" at 129.916,43.814 h1.52
  text "-" at 249.566,43.814 h1.52
  text "-" at 277.244,43.814 h1.52
  text "113" at -16.246,40.004 h1.52
  text "10.00mil (0.254mm)" at -1.518,40.004 h1.52
  text "PTH" at 26.414,40.004 h1.52
  text "Round" at 39.263,40.004 h1.52
  text "Top Layer - Bottom Layer" at 57.902,40.004 h1.52
  text "Via" at 95.99,40.004 h1.52
  text "Rounded" at 110.972,40.004 h1.52
  text "v41h25m0mx0" at 129.916,40.004 h1.52
  text "-" at 249.566,40.004 h1.52
  text "-" at 277.244,40.004 h1.52
  text "119 Total" at -16.246,36.194 h1.52
  text "Slot definitions :" at -29.095,32.511 h1.52
  text "Routed Path Length" at -2.865,32.511 h1.52
  text "= Calculated from tool start centre position to tool end centre position." at 25.143,32.511 h1.52
  text "Hole Length" at -2.865,29.972 h1.52
  text "= Routed Path Length + Tool Size = Slot length as defined in the PCB layout" at 14.732,29.972 h1.52